# Altium PCB FPGA.PcbDoc
Units mil, origin at the board's own origin, x right, y up, seen from the top; angles counter-clockwise.
Board outline 1968.5 x 984.25 mil, 4 copper layers (Top Layer, Mid-Layer 1, Mid-Layer 2, Bottom Layer); 72 components, 68 nets, 486 pads, 137 vias.
Unrouted connection lines stored in the file: 6.
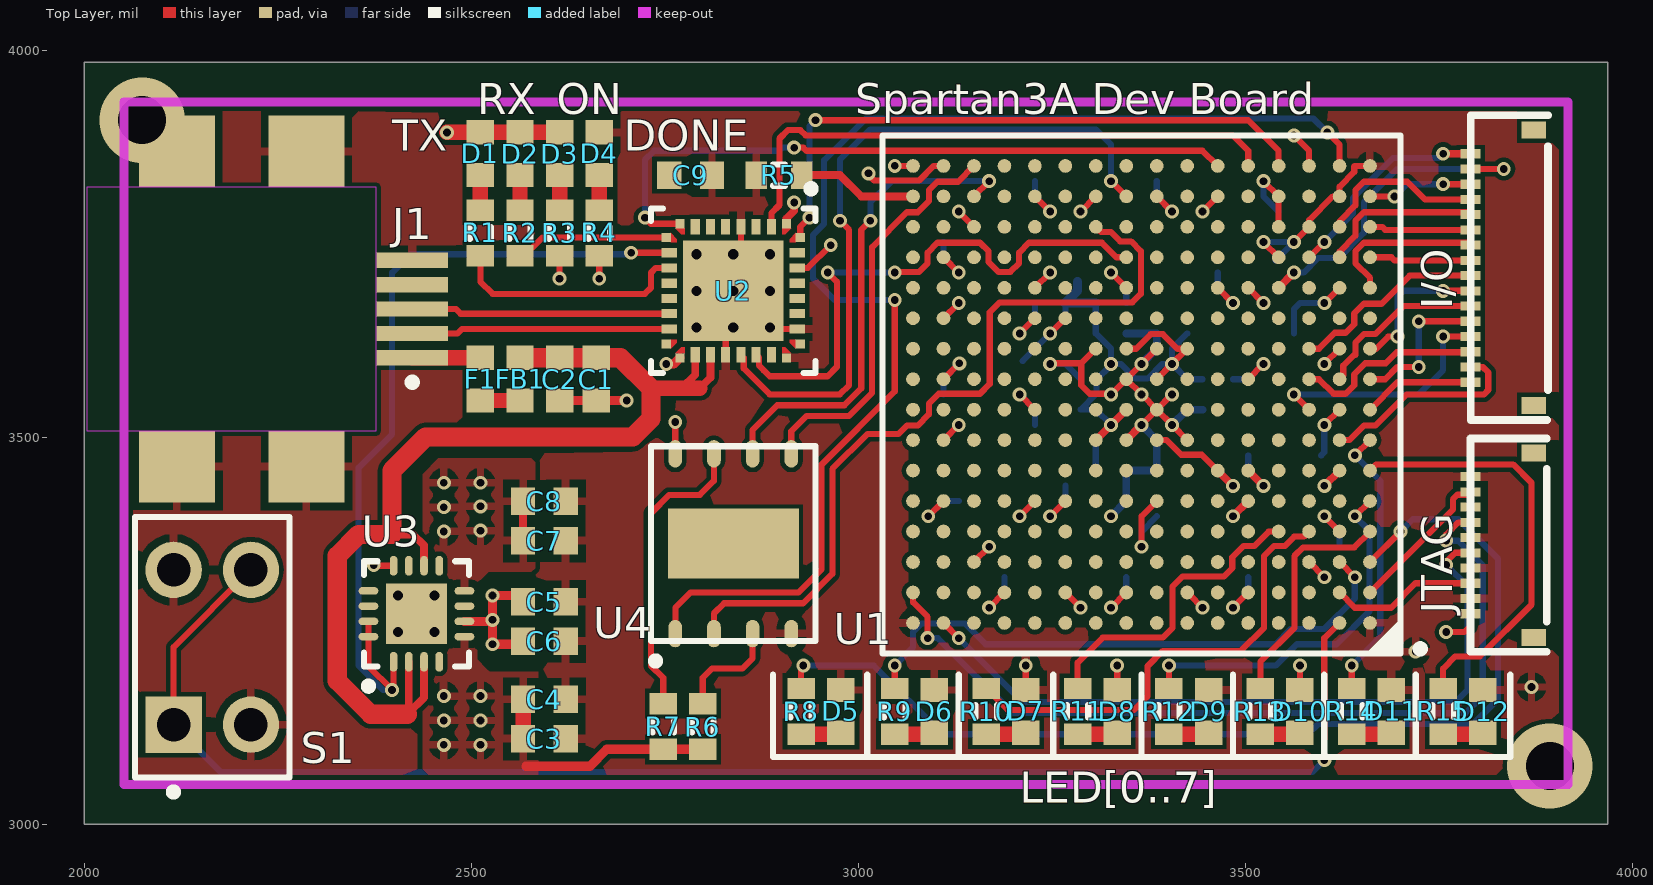
[diagram p0: Top Layer view]
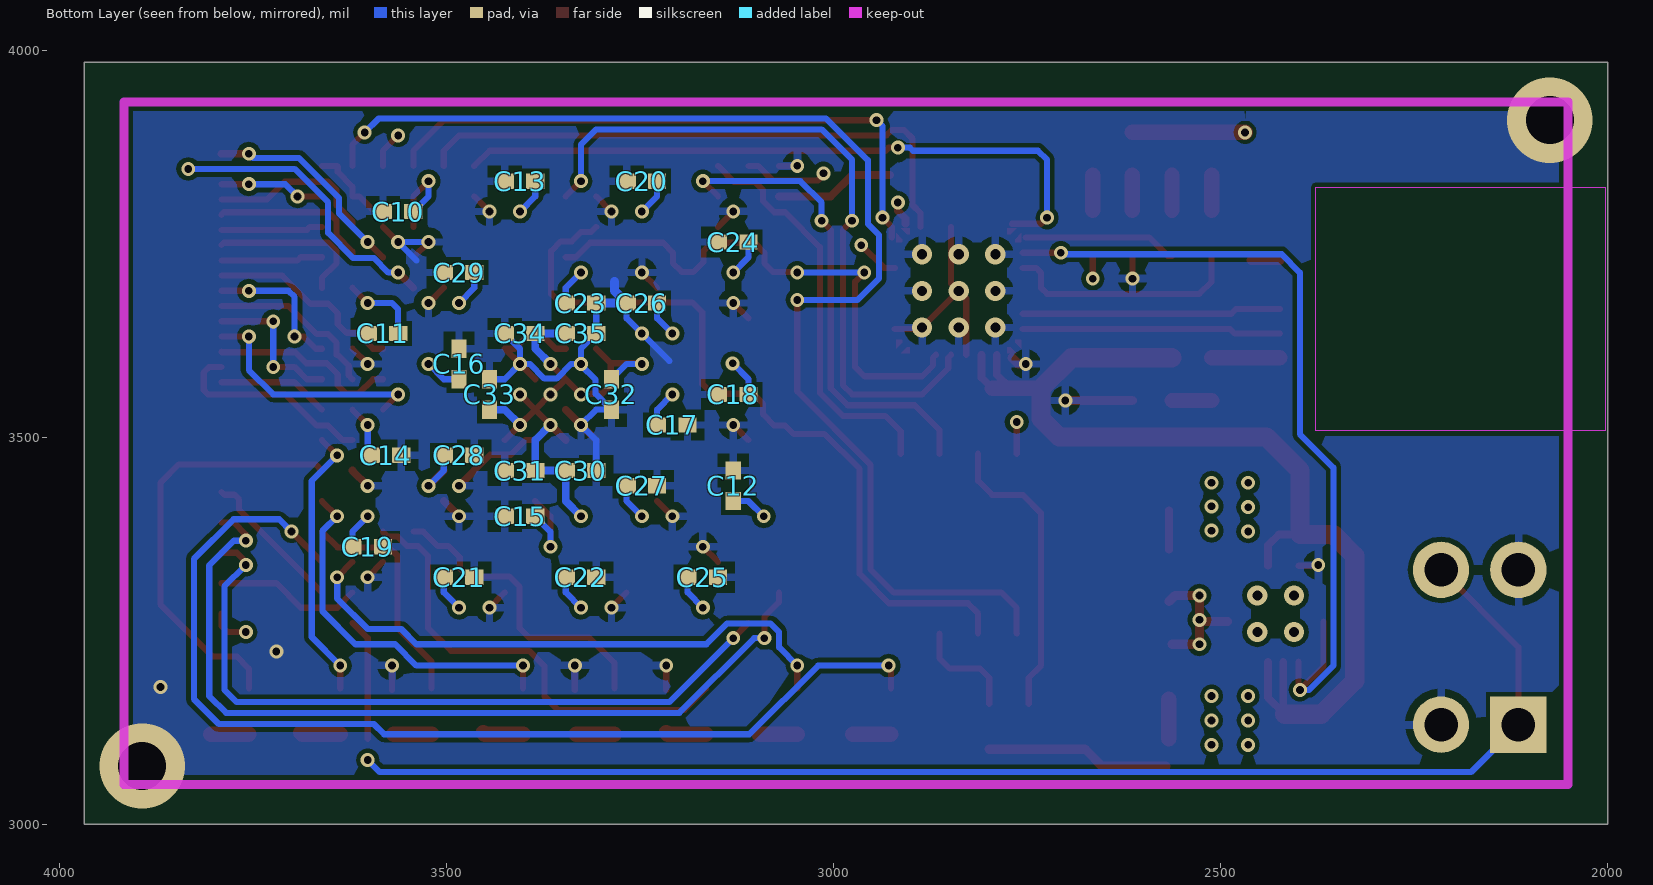
[diagram p1: Bottom Layer view, seen from below]
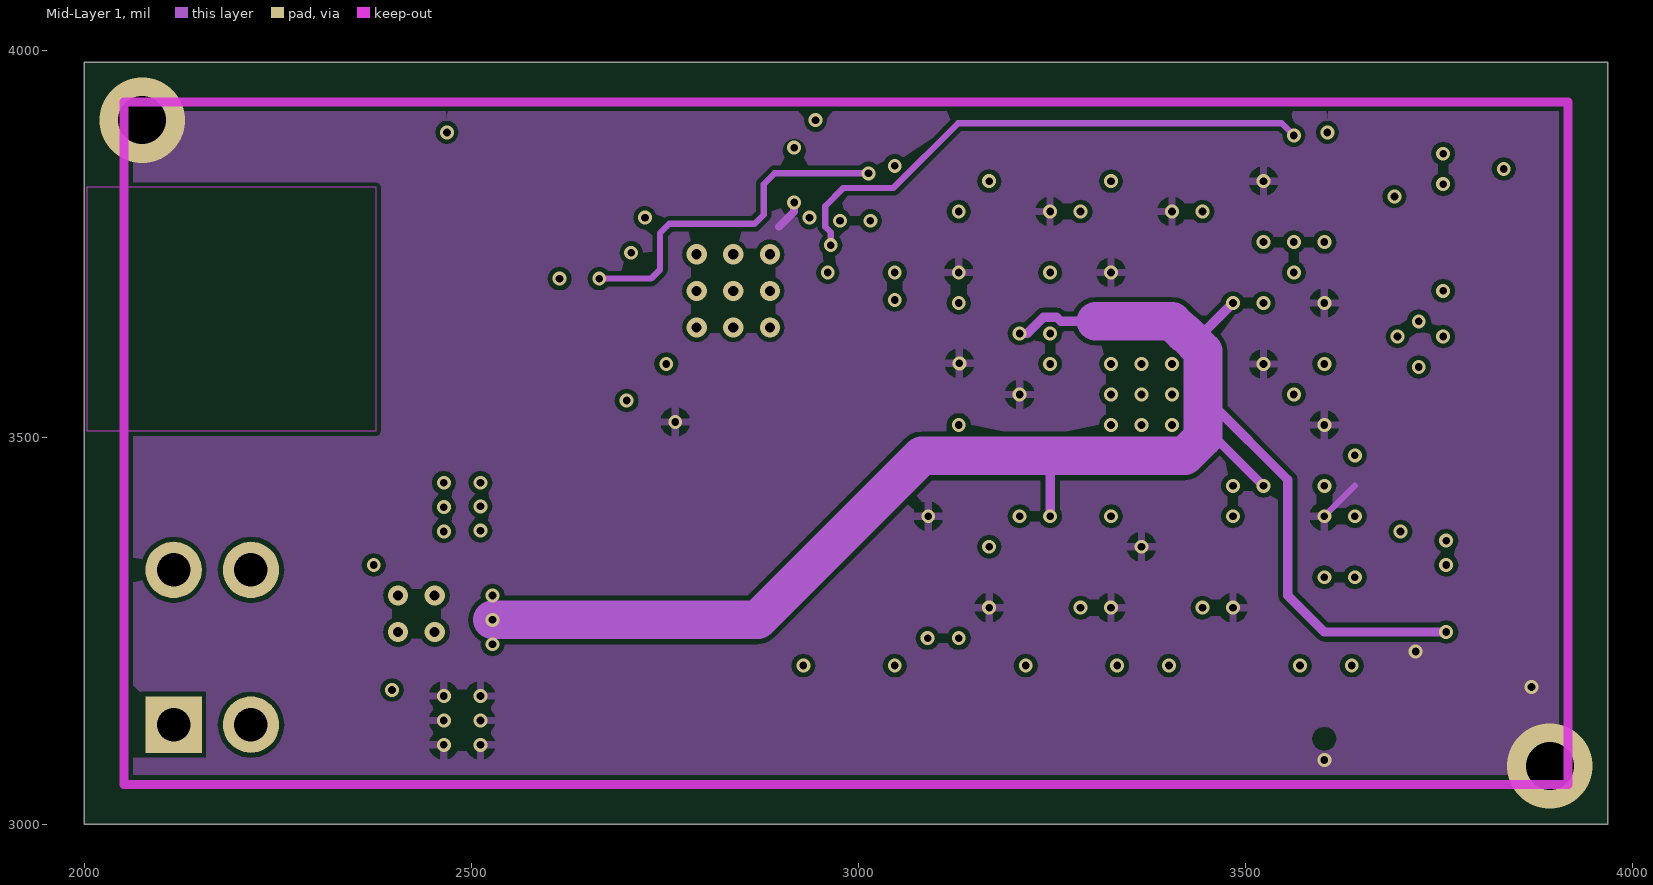
[diagram p2: Mid-Layer 1]
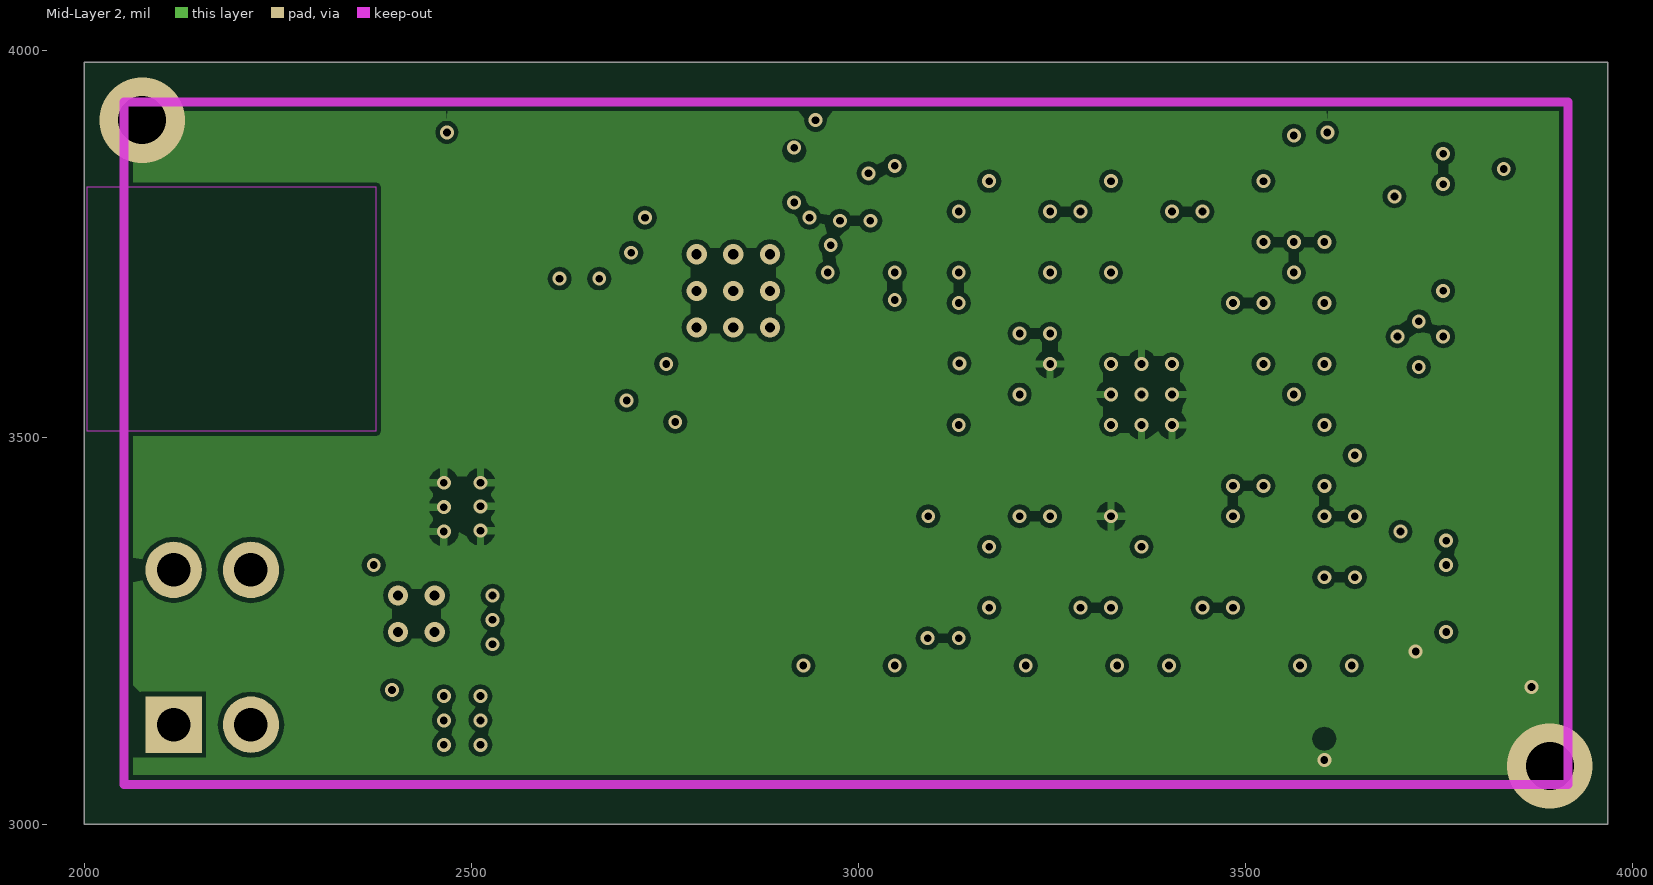
[diagram p3: Mid-Layer 2]

## Layer stack, top to bottom
Top Layer: signal copper 1.4
Dielectric: core 12.6, FR-4, Dk 4.8
Mid-Layer 1: signal copper 1.4
Dielectric: prepreg 12.6, FR-4, Dk 4.8
Mid-Layer 2: signal copper 1.4
Dielectric: core 12.6, FR-4, Dk 4.8
Bottom Layer: signal copper 1.4

## Board outline
2000,3000 3968.5,3000 3968.5,3984.25 2000,3984.25

## Design rules (kind name [scope] priority, off if disabled: settings)
Clearance [All] p1: gap=6
PolygonConnect [All] p1: connectstyle=Relief reliefconductorwidth=10 reliefentries=4 polygonreliefangle="90 Angle" airgapwidth=10
RoomDefinition USB [InComponentClass('USB')] p1: confinementstyle=ConfineIn formatcopy=TRUE lockcomponents=FALSE outline 4015.74,3283.46 8259.83,3283.46 8259.83,5649.6 4015.74,5649.6
RoomDefinition Power [InComponentClass('Power')] p2: confinementstyle=ConfineIn formatcopy=TRUE lockcomponents=FALSE outline 4015.74,3972.43 9039.35,3972.43 9039.35,4976.37 4015.74,4976.37
RoomDefinition IO [InComponentClass('IO')] p3: confinementstyle=ConfineIn formatcopy=TRUE lockcomponents=FALSE outline 4011.8,3055.11 8940.93,3055.11 8940.93,5649.6 4011.8,5649.6
RoutingVias [All] p1: holewidth=10 width=18 viastyle="Through Hole" minholewidth=10 minwidth=18 maxholewidth=10 maxwidth=18
SolderMaskExpansion [All] p1: expansion=4
Width [All] p1: maxlimit=100 minlimit=6 preferedwidth=8
28 further rules are at their usual default settings.

## Classes and differential pairs
component class IO: D5 D6 D7 D8 D9 D10 D11 D12 I/O R6 R7 R8 R9 R10 R11 R12 R13 R14 R15 U1 U4
component class Power: C10 C11 C12 C13 C14 C15 C16 C17 C18 C19 C20 C21 C22 C23 C24 C25 C34 C35 D4 JTAG R4 R5 S1
component class USB: C1 C2 C3 C4 C5 C6 C7 C8 C9 D1 D2 D3 F1 FB1 J1 R1 R2 R3 U2 U3
net class LED[0..7]: LED0 LED1 LED2 LED3 LED4 LED5 LED6 LED7

## Components (designator, comment, footprint, x,y, rotation, side; value= is the part's Value field where it differs from the comment)
C1 "Cap Semi" 1608[0603] 2661.42,3574.8 r90 top
C2 "Cap Semi" 1608[0603] 2614.17,3574.8 r90 top
C3 "Cap Semi" 1608[0603] 2594.49,3110.24 r180 top
C4 "Cap Semi" 1608[0603] 2594.49,3161.42 r180 top
C5 "Cap Semi" 1608[0603] 2594.49,3287.4 r180 top
C6 "Cap Semi" 1608[0603] 2594.49,3236.22 r180 top
C7 "Cap Semi" 1608[0603] 2594.49,3366.14 r180 top
C8 "Cap Semi" 1608[0603] 2594.49,3417.32 r180 top
C9 "Cap Semi" 1608[0603] 2783.46,3838.58 r180 top
C10 "Cap Semi" 0402 3562.99,3791.34 r0 bottom
C11 "Cap Semi" 0402 3582.68,3633.86 r0 bottom
C12 "Cap Semi" 0402 3129.92,3437.01 r90 bottom
C13 "Cap Semi" 0402 3405.51,3830.71 r0 bottom
C14 "Cap Semi" 0402 3578.74,3476.38 r180 bottom
C15 "Cap Semi" 0402 3405.51,3397.64 r0 bottom
C16 "Cap Semi" 0402 3484.25,3594.49 r90 bottom
C17 "Cap Semi" 0402 3208.66,3515.75 r180 bottom
C18 "Cap Semi" 0402 3129.92,3555.12 r0 bottom
C19 "Cap Semi" 0402 3602.36,3358.27 r180 bottom
C20 "Cap Semi" 0402 3248.03,3830.71 r0 bottom
C21 "Cap Semi" 0402 3484.25,3318.9 r180 bottom
C22 "Cap Semi" 0402 3326.77,3318.9 r180 bottom
C23 "Cap Semi" 0402 3326.77,3673.23 r180 bottom
C24 "Cap Semi" 0402 3129.92,3751.97 r0 bottom
C25 "Cap Semi" 0402 3169.29,3318.9 r180 bottom
C26 "Cap Semi" 0402 3248.03,3673.23 r0 bottom
C27 "Cap Semi" 0402 3248.03,3437.01 r180 bottom
C28 "Cap Semi" 0402 3484.25,3476.38 r180 bottom
C29 "Cap Semi" 0402 3484.25,3712.6 r0 bottom
C30 "Cap Semi" 0402 3326.77,3456.69 r180 bottom
C31 "Cap Semi" 0402 3405.51,3456.69 r0 bottom
C32 "Cap Semi" 0402 3287.4,3555.12 r270 bottom
C33 "Cap Semi" 0402 3444.88,3555.12 r90 bottom
C34 "Cap Semi" 0402 3405.51,3633.86 r0 bottom
C35 "Cap Semi" 0402 3326.77,3633.86 r180 bottom
D1 "LED3" 1608[0603] 2511.81,3866.14 r270 top
D2 "LED3" 1608[0603] 2562.99,3866.14 r270 top
D3 "LED3" 1608[0603] 2614.17,3866.14 r270 top
D4 "LED3" 1608[0603] 2665.35,3866.14 r90 top
D5 "LED3" 1608[0603] 2977.44,3145.67 r90 top
D6 "LED3" 1608[0603] 3098.43,3145.67 r90 top
D7 "LED3" 1608[0603] 3216.54,3145.67 r90 top
D8 "LED3" 1608[0603] 3334.65,3145.67 r90 top
D9 "LED3" 1608[0603] 3452.76,3145.67 r90 top
D10 "LED3" 1608[0603] 3570.87,3145.67 r90 top
D11 "LED3" 1608[0603] 3688.98,3145.67 r90 top
D12 "LED3" 1608[0603] 3807.09,3145.67 r90 top
F1 "500mA" 1608[0603] 2511.81,3574.8 r270 top
FB1 "Ferrite Bead" 1608[0603] 2562.99,3574.8 r90 top
I/O "IO" PCBComponent_1 3791.34,3570.87 r90 top
J1 "0481900001" 481900001 2271.65,3665.35 r180 top (schematic designator J?)
JTAG "FH33-10S" "PCBComponent_1 - duplicate" 3791.34,3271.65 r90 top
R1 "Res3" J1-0603 2511.81,3763.78 r90 top
R2 "Res3" J1-0603 2562.99,3763.78 r90 top
R3 "Res3" J1-0603 2614.17,3763.78 r90 top
R4 "Res3" J1-0603 2665.35,3763.78 r270 top
R5 "Res3" J1-0603 2897.64,3838.58 r0 top
R6 "Res3" J1-0603 2799.21,3125.98 r90 top
R7 "Res3" J1-0603 2748.03,3125.98 r270 top
R8 "Res3" J1-0603 2926.26,3145.67 r270 top
R9 "Res3" J1-0603 3047.24,3145.67 r270 top
R10 "Res3" J1-0603 3165.35,3145.67 r270 top
R11 "Res3" J1-0603 3283.46,3145.67 r270 top
R12 "Res3" J1-0603 3401.57,3145.67 r270 top
R13 "Res3" J1-0603 3519.68,3145.67 r270 top
R14 "Res3" J1-0603 3637.8,3145.67 r270 top
R15 "Res3" J1-0603 3755.91,3145.67 r270 top
S1 "SW-DPST" DPST-4 2165.35,3228.35 r90 top
U1 "XC3S50A-4FT256C" FT256 3366.14,3555.12 r180 top
U2 "FT232RQ-Reel" PQFN5X5-32_V 2838.58,3688.98 r270 top
U3 "ADP322" QFN16_N 2429.13,3271.65 r90 top
U4 "W25Q80" QFN127P500X600X80_HS-9N 2838.58,3362.2 r90 top

## Footprints (in the part's own frame and the unit in brackets; to place one, negate y for a bottom-side part, rotate by r counter-clockwise, add the part's x,y. Pads: shape width x height; smd on the part's side, far side on the other; paste and mask are expansions set on the pad)
0402 [mm] "Chip Capacitor, Body 1.0x0.5mm, IPC High Density"
  rect 0.6x0.5 smd: 1(-0.5,0) 2(0.5,0)
  body extent -0.55,-0.3 0.55,0.3, height 1.3
1608[0603] [mm] "Chip Capacitor, Body 1.6x0.8mm, IPC High Density"
  rect 0.8x0.9 smd: 1(-0.7,0) 2(0.7,0)
  body extent -0.87,-0.48 0.87,0.48, height 1.3
481900001 [mm] "Connector; USB Mini-B, Sinking Type, SM; 5 Position; Right Angle"
  rect 2.35x0.5 smd: 1(-3.862,1.6) 2(-3.862,0.8) 3(-3.862,0) 4(-3.862,-0.8) 5(-3.862,-1.6)
  rect 2.5x2.35 smd: MH1(-0.387,-5.175) MH2(3.863,-5.175) MH3(3.863,5.175) MH4(-0.387,5.175)
  Keep-Out Layer region: -2.687,-4 6.813,-4 6.813,4 -2.687,4
  silkscreen extent -3.99,2.28 -3.74,2.52, body extent -1.8,-3.84 6.8,3.86, height 0.35
DPST-4 [mm] "Switch; 4 Leads"
  rect 1.85x1.85 hole 1.1: 1(-2.54,1.27)
  round 1.85 hole 1.1: 2(-2.54,-1.27) 3(2.54,-1.27) 4(2.54,1.27)
  silkscreen extent -4.88,-2.54 4.28,2.54
FT256 [mm] "BGA, 256-Leads, Body 17x17mm, Pitch 1mm"
  round 0.45 smd: A1(-7.5,7.5) A2(-6.5,7.5) A3(-5.5,7.5) A4(-4.5,7.5) A5(-3.5,7.5) A6(-2.5,7.5) A7(-1.5,7.5) A8(-0.5,7.5) A9(0.5,7.5) A10(1.5,7.5) A11(2.5,7.5) A12(3.5,7.5) A13(4.5,7.5) A14(5.5,7.5) A15(6.5,7.5) A16(7.5,7.5) B1(-7.5,6.5) B2(-6.5,6.5) B3(-5.5,6.5) B4(-4.5,6.5) B5(-3.5,6.5) B6(-2.5,6.5) B7(-1.5,6.5) B8(-0.5,6.5) B9(0.5,6.5) B10(1.5,6.5) B11(2.5,6.5) B12(3.5,6.5) B13(4.5,6.5) B14(5.5,6.5) B15(6.5,6.5) B16(7.5,6.5) C1(-7.5,5.5) C2(-6.5,5.5) C3(-5.5,5.5) C4(-4.5,5.5) C5(-3.5,5.5) C6(-2.5,5.5) C7(-1.5,5.5) C8(-0.5,5.5) C9(0.5,5.5) C10(1.5,5.5) C11(2.5,5.5) C12(3.5,5.5) C13(4.5,5.5) C14(5.5,5.5) C15(6.5,5.5) C16(7.5,5.5) D1(-7.5,4.5) D2(-6.5,4.5) D3(-5.5,4.5) D4(-4.5,4.5) D5(-3.5,4.5) D6(-2.5,4.5) D7(-1.5,4.5) D8(-0.5,4.5) D9(0.5,4.5) D10(1.5,4.5) D11(2.5,4.5) D12(3.5,4.5) D13(4.5,4.5) D14(5.5,4.5) D15(6.5,4.5) D16(7.5,4.5) E1(-7.5,3.5) E2(-6.5,3.5) E3(-5.5,3.5) E4(-4.5,3.5) E5(-3.5,3.5) E6(-2.5,3.5) E7(-1.5,3.5) E8(-0.5,3.5) E9(0.5,3.5) E10(1.5,3.5) E11(2.5,3.5) E12(3.5,3.5) E13(4.5,3.5) E14(5.5,3.5) E15(6.5,3.5) E16(7.5,3.5) F1(-7.5,2.5) F2(-6.5,2.5) F3(-5.5,2.5) F4(-4.5,2.5) F5(-3.5,2.5) F6(-2.5,2.5) F7(-1.5,2.5) F8(-0.5,2.5) F9(0.5,2.5) F10(1.5,2.5) F11(2.5,2.5) F12(3.5,2.5) F13(4.5,2.5) F14(5.5,2.5) F15(6.5,2.5) F16(7.5,2.5) G1(-7.5,1.5) G2(-6.5,1.5) G3(-5.5,1.5) G4(-4.5,1.5) G5(-3.5,1.5) G6(-2.5,1.5) G7(-1.5,1.5) G8(-0.5,1.5) G9(0.5,1.5) G10(1.5,1.5) G11(2.5,1.5) G12(3.5,1.5) G13(4.5,1.5) G14(5.5,1.5) G15(6.5,1.5) G16(7.5,1.5) H1(-7.5,0.5) H2(-6.5,0.5) H3(-5.5,0.5) H4(-4.5,0.5) H5(-3.5,0.5) H6(-2.5,0.5) H7(-1.5,0.5) H8(-0.5,0.5) H9(0.5,0.5) H10(1.5,0.5) H11(2.5,0.5) H12(3.5,0.5) H13(4.5,0.5) H14(5.5,0.5) H15(6.5,0.5) H16(7.5,0.5) J1(-7.5,-0.5) J2(-6.5,-0.5) J3(-5.5,-0.5) J4(-4.5,-0.5) J5(-3.5,-0.5) J6(-2.5,-0.5) J7(-1.5,-0.5) J8(-0.5,-0.5) J9(0.5,-0.5) J10(1.5,-0.5) J11(2.5,-0.5) J12(3.5,-0.5) J13(4.5,-0.5) J14(5.5,-0.5) J15(6.5,-0.5) J16(7.5,-0.5) K1(-7.5,-1.5) K2(-6.5,-1.5) K3(-5.5,-1.5) K4(-4.5,-1.5) K5(-3.5,-1.5) K6(-2.5,-1.5) K7(-1.5,-1.5) K8(-0.5,-1.5) K9(0.5,-1.5) K10(1.5,-1.5) K11(2.5,-1.5) K12(3.5,-1.5) K13(4.5,-1.5) K14(5.5,-1.5) K15(6.5,-1.5) K16(7.5,-1.5) L1(-7.5,-2.5) L2(-6.5,-2.5) L3(-5.5,-2.5) L4(-4.5,-2.5) L5(-3.5,-2.5) L6(-2.5,-2.5) L7(-1.5,-2.5) L8(-0.5,-2.5) L9(0.5,-2.5) L10(1.5,-2.5) L11(2.5,-2.5) L12(3.5,-2.5) L13(4.5,-2.5) L14(5.5,-2.5) L15(6.5,-2.5) L16(7.5,-2.5) M1(-7.5,-3.5) M2(-6.5,-3.5) M3(-5.5,-3.5) M4(-4.5,-3.5) M5(-3.5,-3.5) M6(-2.5,-3.5) M7(-1.5,-3.5) M8(-0.5,-3.5) M9(0.5,-3.5) M10(1.5,-3.5) M11(2.5,-3.5) M12(3.5,-3.5) M13(4.5,-3.5) M14(5.5,-3.5) M15(6.5,-3.5) M16(7.5,-3.5) N1(-7.5,-4.5) N2(-6.5,-4.5) N3(-5.5,-4.5) N4(-4.5,-4.5) N5(-3.5,-4.5) N6(-2.5,-4.5) N7(-1.5,-4.5) N8(-0.5,-4.5) N9(0.5,-4.5) N10(1.5,-4.5) N11(2.5,-4.5) N12(3.5,-4.5) N13(4.5,-4.5) N14(5.5,-4.5) N15(6.5,-4.5) N16(7.5,-4.5) P1(-7.5,-5.5) P2(-6.5,-5.5) P3(-5.5,-5.5) P4(-4.5,-5.5) P5(-3.5,-5.5) P6(-2.5,-5.5) P7(-1.5,-5.5) P8(-0.5,-5.5) P9(0.5,-5.5) P10(1.5,-5.5) P11(2.5,-5.5) P12(3.5,-5.5) P13(4.5,-5.5) P14(5.5,-5.5) P15(6.5,-5.5) P16(7.5,-5.5) R1(-7.5,-6.5) R2(-6.5,-6.5) R3(-5.5,-6.5) R4(-4.5,-6.5) R5(-3.5,-6.5) R6(-2.5,-6.5) R7(-1.5,-6.5) R8(-0.5,-6.5) R9(0.5,-6.5) R10(1.5,-6.5) R11(2.5,-6.5) R12(3.5,-6.5) R13(4.5,-6.5) R14(5.5,-6.5) R15(6.5,-6.5) R16(7.5,-6.5) T1(-7.5,-7.5) T2(-6.5,-7.5) T3(-5.5,-7.5) T4(-4.5,-7.5) T5(-3.5,-7.5) T6(-2.5,-7.5) T7(-1.5,-7.5) T8(-0.5,-7.5) T9(0.5,-7.5) T10(1.5,-7.5) T11(2.5,-7.5) T12(3.5,-7.5) T13(4.5,-7.5) T14(5.5,-7.5) T15(6.5,-7.5) T16(7.5,-7.5)
  silkscreen extent -9.28,-8.5 8.5,8.5, body extent -8.5,-8.5 8.5,8.5, height 1.55
J1-0603 [mm] "Chip Resistor, Body 1.6x0.8mm, IPC High Density"
  rect 0.7x0.9 smd: 1(-0.75,0) 2(0.75,0)
  silkscreen extent -0.2,-0.35 0.2,0.35, body extent -0.85,-0.48 0.85,0.48, height 0.9
PCBComponent_1 [mm]
  rect 0.55x0.8 smd mask+0.05: 0(-0.763,-2.075) 0(8.275,-2.075)
  rect 0.3x0.65 smd mask+0.05: 1(0,0) 2(0.5,0) 3(1,0) 4(1.5,0) 5(2,0) 6(2.5,0) 7(3,0) 8(3.5,0) 9(4,0) 10(4.5,0) 11(5,0) 12(5.5,0) 13(6,0) 14(6.5,0) 15(7,0) 16(7.5,0)
  silkscreen extent -1.24,-2.54 8.76,-0.01
"PCBComponent_1 - duplicate" [mm]
  rect 0.55x0.8 smd mask+0.05: 0(-0.775,-2.075) 0(5.275,-2.075)
  rect 0.3x0.65 smd mask+0.05: 1(0,0) 2(0.5,0) 3(1,0) 4(1.5,0) 5(2,0) 6(2.5,0) 7(3,0) 8(3.5,0) 9(4,0) 10(4.5,0)
  silkscreen extent -1.25,-2.5 5.75,0
PQFN5X5-32_V [mm] "QFN, 32-Leads, Body 5x5mm, Pitch 0.5mm, FTDI Recommended"
  rect 0.3x0.3 smd paste-0.15: 1(-2.2,1.75) 8(-2.2,-1.75) 9(-1.75,-2.2) 16(1.75,-2.2) 17(2.2,-1.75) 24(2.2,1.75) 25(1.75,2.2) 32(-1.75,2.2)
  rect 0.5x0.3 smd paste-0.15: 2(-2.1,1.25) 3(-2.1,0.75) 4(-2.1,0.25) 5(-2.1,-0.25) 6(-2.1,-0.75) 7(-2.1,-1.25) 18(2.1,-1.25) 19(2.1,-0.75) 20(2.1,-0.25) 21(2.1,0.25) 22(2.1,0.75) 23(2.1,1.25)
  rect 0.3x0.5 smd paste-0.15: 10(-1.25,-2.1) 11(-0.75,-2.1) 12(-0.25,-2.1) 13(0.25,-2.1) 14(0.75,-2.1) 15(1.25,-2.1) 26(1.25,2.1) 27(0.75,2.1) 28(0.25,2.1) 29(-0.25,2.1) 30(-0.75,2.1) 31(-1.25,2.1)
  rect 3.3x3.3 smd paste-1.65: 33(0,0)
  Top Layer region: -1.6,2.05 -1.6,1.85 -1.7,1.85 -1.9,2.05
  Top Layer region: 1.6,2.05 1.6,1.85 1.7,1.85 1.9,2.05
  Top Layer region: 1.6,-2.05 1.6,-1.85 1.7,-1.85 1.9,-2.05
  Top Layer region: -1.6,-2.05 -1.6,-1.85 -1.7,-1.85 -1.9,-2.05
  Top Layer region: -2.05,1.6 -1.85,1.6 -1.85,1.7 -2.05,1.9
  Top Layer region: 2.05,1.6 1.85,1.6 1.85,1.7 2.05,1.9
  Top Layer region: 2.05,-1.6 1.85,-1.6 1.85,-1.7 2.05,-1.9
  Top Layer region: -2.05,-1.6 -1.85,-1.6 -1.85,-1.7 -2.05,-1.9
  silkscreen extent -3.47,-2.7 2.7,2.7, body extent -2.55,-2.55 2.55,2.55, height 1
QFN16_N [mm] "QFN, 16-Leads, Body 3x3mm, Pitch 0.5mm, IPC Medium Density"
  oval 0.65x0.25 smd: 1(-1.575,0.75) 2(-1.575,0.25) 3(-1.575,-0.25) 4(-1.575,-0.75) 9(1.575,-0.75) 10(1.575,-0.25) 11(1.575,0.25) 12(1.575,0.75)
  oval 0.25x0.65 smd: 5(-0.75,-1.575) 6(-0.25,-1.575) 7(0.25,-1.575) 8(0.75,-1.575) 13(0.75,1.575) 14(0.25,1.575) 15(-0.25,1.575) 16(-0.75,1.575)
  rect 2x2 smd: 17(0,0)
  silkscreen extent -2.5,-1.73 1.73,1.73, body extent -1.58,-1.58 1.58,1.58, height 0.9
QFN127P500X600X80_HS-9N [mm] "QFN, 8-Leads, Body 5.00x6.00mm, Pitch 1.27mm, Thermal Pad 2.30x4.30mm, IPC Medium Density"
  oval 0.9x0.45 smd: 1(-2.95,1.905) 2(-2.95,0.635) 3(-2.95,-0.635) 4(-2.95,-1.905) 5(2.95,-1.905) 6(2.95,-0.635) 7(2.95,0.635) 8(2.95,1.905)
  rect 2.3x4.3 smd: 9(0,0)
  silkscreen extent -3.97,-2.7 3.2,2.7, body extent -3.05,-2.56 3.05,2.54, height 0.8

## Part data
C1 C2 C3 C4 C5 C6 C7 C8 C9 C10 C11 C12 C13 C14 C15 C16 C17 C18 C19 C20 C21 C22 C23 C24 C25 C26 C27 C28 C29 C30 C31 C32 C33 C34 C35: "Capacitor (Semiconductor SIM Model)"
D1 D2 D3 D4 D5 D6 D7 D8 D9 D10 D11 D12: "Typical BLUE SiC LED"
F1: library part "Fuse 2", "Fuse"
FB1: library part Inductor, "Inductor"
I/O JTAG U3 U4: library part Component_1
J1: "USB On-The-Go (OTG) Mini-B Receptacle, Right Angle, SMT, 0.80mm (.031\") Pitch, Solder Tabs with Back Cover, Recessed Type"
R1 R2 R3 R4 R5 R6 R7 R8 R9 R10 R11 R12 R13 R14 R15: "Resistor"
S1: "Double-Pole, Single-Throw Switch"
U1: "Spartan-3A I/O Optimized FPGA, 144 User I/Os, 256-Ball FTBGA, Standard Performance, Commercial Grade"
U2: "USB UART Asynchronous Serial Data Transfer Chip, QFN-32, Tape and Reel"

## Via types
v1: diameter 18, hole 10, Top Layer to Bottom Layer, tented both sides, 107 vias
v2: diameter 18, hole 10, Top Layer to Bottom Layer, 15 vias
v3: diameter 25.98, hole 12.99, Top Layer to Bottom Layer, tented top, 13 vias
v4: diameter 110, hole 62, Top Layer to Bottom Layer, 2 vias

## Nets (pads, with @x,y where several pads share a name; then routed paths per layer and width w, separated by ;. In a path a pad name is that pad's centre, name@x,y a point inside that pad or via, vN(x,y) a via of type N, cw(c..) or ccw(c..) an arc to the next point about the centre after c; other vN are vias at no path point)
1V2: C7.2 C8.2 C30.1 C31.1 C32.1 C33.1 C34.1 C35.1 U1.G7 U1.G9 U1.H8 U1.J9 U1.K8 U1.K10 U3.8 | length 820.4
  Top Layer w8: v1(3248.03,3594.49) 3248.86,3595.31 3288.23,3595.31 ; U1.K10 3288.23,3595.31 ; v1(3366.14,3515.75) U1.H8 ; U1.K8 v1(3366.14,3594.49) U1.J9 ; v1(3405.51,3555.12) U1.H8 ; U1.G7 v1(3405.51,3515.75) U1.H8 ; 3288.23,3595.31 3288.23,3566.99 3299.28,3555.94 3325.95,3555.94 v1(3326.77,3555.12) U1.J9 ; U1.J9 v1(3366.14,3555.12) U1.H8
  Top Layer w10: C7.2@2566.93,3354.33 C8.2@2566.93,3405.51 ; U1.G9 v1(3366.14,3515.75)
  Bottom Layer w8: v1(3248.03,3594.49) 3267.72,3594.49 C32.1
  Bottom Layer w10: v1(3326.77,3397.64) 3346.46,3417.32 C30.1 C31.1@3381.89,3456.69 ; C35.1 C34.1 3385.83,3614.17 v1(3366.14,3594.49) ; v1(3366.14,3515.75) 3385.83,3496.06 C31.1 ; v1(3405.51,3515.75) 3425.2,3535.43 C33.1
  other v2: 2464.57,3377.95 2511.81,3379.02 2464.57,3409.45 2511.81,3410.51 2464.57,3440.94 2511.81,3440.94
2V5: C5.2 C6.2 C26.1 C27.1 C28.1 C29.1 JTAG.1 U1.E11 U1.F5 U1.L12 U1.M6 U3.6 | length 2706.2
  Top Layer w8: v1(3208.66,3633.86) U1.L12 ; v1(3248.03,3397.64) U1.E11 ; U1.M6 v1(3484.24,3673.22) ; v1(3759.84,3248.03) 3783.46,3248.03 3791.34,3255.91 JTAG.1
  Top Layer w10: U1.F5 v1(3523.61,3437)
  Top Layer w12: U3.6 v2@2525.59,3261.81 ; C6.2@2562.99,3232.28 v2(2527.56,3232.28) 2527.56,3259.84 v2@2525.59,3261.81 ; C5.2 2559.05,3295.28 v2(2527.56,3295.28) v2(2527.56,3263.78) v2@2525.59,3261.81
  Mid-Layer 1 w8: 3422.08,3634.49 3445.51,3634.49
  Mid-Layer 1 w12: v1(3208.66,3633.86) 3218.33,3633.86 3239.33,3654.86 3256.73,3654.86 3261.98,3649.61 3307.09,3649.61 ; v1(3248.03,3397.64) 3248.03,3471.81 3251.97,3475.75 ; 3445.51,3499.18 3461.44,3499.18 v1(3523.61,3437) ; 3445.51,3543.31 3456.69,3543.31 3555.12,3444.88 3555.12,3295.28 3602.36,3248.03 v1(3759.84,3248.03) ; 3445.51,3634.49 v1(3484.24,3673.22)
  Mid-Layer 1 w50: v2(2527.56,3263.78) 2870.08,3263.78 3082.05,3475.75 3251.97,3475.75 3422.08,3475.75 3445.51,3499.18 3445.51,3543.31 3445.51,3611.06 3422.08,3634.49 3420.63,3634.49 3405.51,3649.61 3307.09,3649.61
  Bottom Layer w8: v1(3208.66,3633.86) 3228.35,3653.54 C26.1 ; v1(3248.03,3397.64) 3267.72,3417.32 C27.1 ; C29.1 3464.57,3692.9 v1(3484.24,3673.22) ; C28.1 3503.94,3456.68 v1(3523.61,3437)
3V3: C3.2 C4.2 C9.2 C10.1 C11.1 C12.1 C13.1 C14.1 C15.1 C16.1 C17.1 C18.1 C19.1 C20.1 C21.1 C22.1 C23.1 C24.1 C25.1 R6.1 R7.2 U1.B5 U1.B9 U1.B13 U1.D2 U1.E8 U1.E15 U1.H2 U1.H12 U1.J5 U1.J15 U1.M2 U1.M9 U1.N15 U1.P4 U1.R4 U1.R8 U1.R12 U2.1 U3.5 U4.8 | length 1763.6
  Top Layer w8: U4.8 v1(2763.58,3519.49) ; v1(3090.55,3397.64) U1.E15 ; U1.J15 v1(3130.75,3595.31) ; U1.N15 v1(3129.92,3712.6) ; v1(3169.29,3279.53) U1.B13 ; v1(3208.66,3555.12) U1.H12 ; U1.R12 v1(3248.03,3791.34) ; v1(3326.77,3279.53) U1.B9 ; v1(3326.77,3712.6) U1.M9 ; v1(3366.14,3358.27) 3366.14,3397.64 U1.E8 ; U1.R8 v1(3405.51,3791.34) ; v1(3484.25,3279.53) U1.B5 ; U1.J5 v1(3523.62,3594.49) ; v1(3523.62,3830.71) U1.R4 U1.P4 ; v1(3602.36,3397.64) U1.D2 ; v1(3602.36,3515.75) U1.H2 ; v1(3602.36,3673.23) U1.M2
  Top Layer w10: U2.1 2907.48,3782.54 2917.32,3792.38 v1(2917.32,3803.15)
  Top Layer w12: 2570.87,3074.8 2653.54,3074.8 2675.2,3096.46 R6.1
  Top Layer w20: C3.2 C4.2
  Mid-Layer 1 w8: v1(3602.36,3397.64) 3641.73,3437.01
  Mid-Layer 1 w10: 2897.64,3771.65 2917.01,3791.02 2917.01,3802.83 v1(2917.32,3803.15)
  Bottom Layer w8: v1(3090.55,3397.64) 3110.24,3417.32 C12.1 ; C18.1 3110.24,3574.8 v1(3130.75,3595.31) ; C24.1 3110.24,3732.28 v1(3129.92,3712.6) ; v1(3169.29,3279.53) 3188.98,3299.21 C25.1 ; v1(3208.66,3555.12) 3228.35,3535.43 C17.1 ; C20.1 3228.35,3811.02 v1(3248.03,3791.34) ; v1(3326.77,3279.53) 3346.46,3299.21 C22.1 ; v1(3326.77,3712.6) 3346.46,3692.91 C23.1 ; v1(3366.14,3358.27) 3366.14,3377.95 C15.1 ; C13.1 3385.83,3811.02 v1(3405.51,3791.34) ; v1(3484.25,3279.53) 3503.94,3299.21 C21.1 ; C16.1 3503.94,3574.8 v1(3523.62,3594.49) ; v1(3523.62,3830.71) 3523.62,3811.02 C10.1 ; C11.1 3562.99,3665.35 3570.87,3673.23 v1(3602.36,3673.23) ; C14.1 3602.36,3480.32 v1(3602.36,3515.75) ; v1(3602.36,3397.64) 3622.05,3377.95 C19.1
  other v2: 2464.57,3102.36 2511.81,3102.36 2464.57,3133.86 2511.81,3133.86 2464.57,3165.35 2511.81,3165.35
3V3_FTDI: D1.1 D2.1 D3.1 | length 145.7
  Top Layer w20: v1(2468.5,3893.7) D1.1 D2.1 D3.1
CLK: U1.R14 U4.6 | length 631.4
  Top Layer w8: U4.6 2863.58,3509.25 2895.45,3541.12 2982.18,3541.12 3003.94,3562.88 3003.94,3767.72 v1(3015.75,3779.53) ; U1.R14 v1(3169.29,3830.71)
  Bottom Layer w8: v1(3015.75,3779.53) 3015.75,3803.15 3043.31,3830.71 v1(3169.29,3830.71)
CSO: U1.T2 U4.1 | length 1636.2
  Top Layer w8: U4.1 2763.78,3246.26 2763.78,3279.53 2783.46,3299.21 2922.97,3299.21 2952.76,3329 2952.76,3464.57 3047.24,3559.06 v1(3047.24,3677.17) ; v1(3606.3,3893.7) 3622.05,3877.95 U1.T2
  Bottom Layer w8: v1(3047.24,3677.17) 2969.19,3677.17 2941.63,3704.73 2941.63,3761.22 2956.01,3775.59 2956.01,3857.7 3009.95,3911.64 3588.36,3911.64 v1(3606.3,3893.7)
DONE_LED: R4.2 U1.T15 | length 594.6
  Top Layer w8: v1(2665.35,3704.72) R4.2 ; v1(3013.46,3840.87) 3013.46,3838.58 3020.51,3831.54 3078.68,3831.54 3097.54,3850.39 U1.T15
  Mid-Layer 1 w8: v1(2665.35,3704.72) 2732.28,3704.72 2744.09,3716.54 2744.09,3763.78 2755.91,3775.59 2866.14,3775.59 2877.95,3787.4 2877.95,3826.77 2892.05,3840.87 v1(3013.46,3840.87)
GND: C1.1 C2.1 C3.1 C4.1 C5.1 C6.1 C7.1 C8.1 C9.1 C10.2 C11.2 C12.2 C13.2 C14.2 C15.2 C16.2 C17.2 C18.2 C19.2 C20.2 C21.2 C22.2 C23.2 C24.2 C25.2 C26.2 C27.2 C28.2 C29.2 C30.2 C31.2 C32.2 C33.2 C34.2 C35.2 D4.2 D5.2 D6.2 D7.2 D8.2 D9.2 D10.2 D11.2 D12.2 J1.5 J1.MH1 J1.MH2 J1.MH3 J1.MH4 JTAG.2 JTAG.4 JTAG.6 JTAG.8 JTAG.10 R3.1 R5.1 S1.2 S1.4 U1.A1 U1.A16 U1.B7 U1.B11 U1.C3 U1.C14 U1.E5 U1.E12 U1.F2 U1.F6 U1.G8 U1.G10 U1.G15 U1.H9 U1.J8 U1.K2 U1.K7 U1.K9 U1.L11 U1.L15 U1.M5 U1.M12 U1.N4 U1.P3 U1.P14 U1.R2 U1.R6 U1.R10 U1.T1 U1.T16 U2.4 U2.17 U2.20 U2.24 U2.26 U2.33 U3.12 U3.17 U4.4 | length 2288.3
  Top Layer w8: v1(2374.01,3334.64) 2374.99,3333.66 U3.12 ; v1(2614.17,3704.72) R3.1 ; U2.20 2828.74,3679.13 v3(2838.58,3688.98) v3(2885.83,3641.73) 2887.8,3639.76 U2.26 ; U2.33@2848.43,3698.82 U2.4 ; v1(3047.24,3850.54) 3047.39,3850.39 U1.T16 ; U1.G15 v1(3129.92,3515.75) ; U1.L15 v1(3129.92,3673.23) ; v1(3129.92,3791.34) U1.P14 ; U1.C14 v1(3169.28,3358.26) ; v1(3208.66,3397.64) U1.E12 ; D7.2 v1(3216.54,3204.72) ; U1.M12 v1(3248.03,3712.6) ; v1(3248.03,3633.86) U1.L11 ; U1.B11 v1(3287.4,3279.53) ; v1(3287.4,3791.34) U1.R10 ; D8.2 v1(3334.65,3204.72) ; U1.K9 3359.16,3614.17 3378.02,3633.03 3393.64,3633.03 3412.5,3614.17 U1.K7 v1(3405.51,3594.49) U1.J8 ; U1.G8 3398.53,3496.06 3417.39,3477.2 3444.06,3477.2 U1.F6 ; U1.B7 3447.92,3276.49 v1(3444.88,3279.52) ; v1(3444.88,3791.34) U1.R6 ; U1.M5 v1(3523.61,3673.22) ; v1(3523.62,3751.97) U1.N4 ; v1(3562.99,3751.97) U1.P3 ; D10.2 v1(3570.87,3204.72) ; U1.C3 v1(3602.36,3318.9) ; U1.P3@3582.68,3780.17 3613.53,3811.02 U1.R2 3622.05,3823.72 3640.91,3842.58 3640.91,3849.57 3641.73,3850.39 U1.T1 ; v1(3602.36,3594.49) U1.K2
  Top Layer w10: U1.G10 U1.H9 ; U1.F6 v1(3484.25,3437.01) ; v1(3484.25,3397.64) U1.E5 ; v1(3602.36,3437.01) U1.F2
  Top Layer w12: J1.5 J1.5@2460.63,3728.35 ; C2.1 C1.1 v1(2700.79,3547.24) ; v1(2751.97,3594.49) 2761.81,3594.49 U2.17
  Bottom Layer w8: 3212.6,3598.43 v1(3248.03,3633.86) 3267.72,3653.54 C26.2 C23.2 C35.2 3326.77,3614.17 v1(3326.77,3594.49) ; C30.2 3307.09,3496.06 v1(3326.77,3515.75) 3307.09,3535.43 C32.2 3307.77,3555.8 3307.77,3574.12 3326.77,3593.12 v1(3326.77,3594.49) ; C34.2 3405.51,3614.17 v1(3405.51,3594.49) ; C33.2 3425.2,3574.8 v1(3405.51,3594.49) ; v1(3523.62,3751.97) v1(3562.99,3751.97) 3539.37,3728.35 ; v1(3326.77,3594.49) 3339.27,3594.49 3358.27,3575.49 3374.01,3575.49 3393.01,3594.49 v1(3405.51,3594.49)
  Bottom Layer w12: 3283.46,3700.79 3283.46,3688.98 C26.2 C23.2
  other v1: 3870.08,3177.17 3720.44,3222.86
  other v3: 2791.34,3641.73 2838.58,3641.73 2791.34,3688.98 2885.83,3688.98 2791.34,3736.22 2838.58,3736.22 2885.83,3736.22
LED_0: R8.1 U1.C1 | length 1374.5
  Top Layer w8: R8.1 2926.26,3201.85 v1(2929.13,3204.72) ; U1.C1 v1(3700.79,3377.95)
  Bottom Layer w8: v1(2929.13,3204.72) 3020.37,3204.72 3109.18,3115.92 3581.18,3115.92 3594.49,3129.24 3794.59,3129.24 3826.77,3161.42 3826.77,3342.52 3775.59,3393.7 3716.54,3393.7 v1(3700.79,3377.95)
LED_1: R9.1 U1.C2 | length 749.2
  Top Layer w8: R9.1 v1(3047.24,3204.72) ; U1.C2 v1(3641.73,3318.9)
  Bottom Layer w8: v1(3047.24,3204.72) 3070.72,3228.2 3070.72,3248.03 3081.85,3259.16 3137.79,3259.16 3164.67,3232.28 3539.37,3232.28 3559.06,3251.97 3602.36,3251.97 3641.73,3291.34 v1(3641.73,3318.9)
LED_2: R10.1 U1.D3 | length 601.4
  Top Layer w8: R10.1 3193.07,3147.48 3356.5,3147.48 3373.86,3164.83 3373.86,3203.88 3393.7,3223.72 3494.49,3223.72 3524.45,3253.68 3524.45,3346.39 3537.15,3359.09 3551.12,3359.09 3563.47,3371.44 3576.17,3371.44 U1.D3
LED_3: R11.1 U1.D4 | length 402.9
  Top Layer w8: R11.1 3283.46,3208.66 3315.79,3240.98 3393.64,3240.98 3406.34,3253.68 3406.34,3307.02 3419.04,3319.72 3472.38,3319.72 3483.43,3330.77 3483.43,3344.74 3497.78,3359.09 3511.75,3359.09 3530.61,3377.95 U1.D4
LED_4: R12.1 U1.E1 | length 476.2
  Top Layer w8: R12.1 v1(3401.57,3204.72) ; v1(3641.73,3397.64) U1.E1
  Bottom Layer w8: v1(3401.57,3204.72) 3539.37,3204.72 3566.93,3232.28 3618.11,3232.28 3660.73,3274.91 3660.73,3378.64 v1(3641.73,3397.64)
LED_5: R13.1 U1.D1 | length 300.1
  Top Layer w8: R13.1 3519.69,3209.55 3563.82,3253.68 3563.82,3346.39 3574.87,3357.44 3640.91,3357.44 U1.D1
LED_6: R14.1 U1.G1 | length 358
  Top Layer w8: R14.1 v1(3637.8,3204.72) ; v1(3641.73,3476.38) U1.G1
  Bottom Layer w8: v1(3637.8,3204.72) 3674.73,3241.66 3674.73,3443.38 v1(3641.73,3476.38)
LED_7: R15.1 U1.F1 | length 553.3
  Top Layer w8: U1.F1 3669.45,3464.72 3846.3,3464.72 3870.08,3440.94 3870.08,3283.46 3803.15,3216.54 3771.65,3216.54 3755.91,3200.79 R15.1
MISO: U1.T14 U4.5 | length 525.8
  Top Layer w8: U4.5 2913.58,3507.63 2933.07,3527.12 2987.98,3527.12 3017.94,3557.08 3017.94,3745.39 3063.05,3790.51 3077.02,3790.51 3091.38,3804.87 3091.38,3818.83 3102.42,3829.88 3129.09,3829.88 U1.T14
MOSI: U1.P10 U4.2 | length 1017
  Top Layer w8: U4.2 2813.58,3272.02 2826.77,3285.21 2928.77,3285.21 2966.76,3323.2 2966.76,3458.77 3011.86,3503.87 3052.01,3503.87 3063.05,3514.92 3077.02,3514.92 3091.38,3529.28 3091.38,3543.24 3104.08,3555.94 3157.42,3555.94 3170.12,3568.65 3170.12,3661.35 3182.82,3674.06 3354.27,3674.06 3365.32,3685.1 3365.32,3740.09 3352.61,3752.8 3338.65,3752.8 3326.3,3765.14 3313.6,3765.14 U1.P10
Net_1: I/O.1 U1.H1 | length 144.6
  Top Layer w8: U1.H1 3696.85,3570.87 I/O.1
Net_2: I/O.2 U1.G2 | length 267.3
  Top Layer w8: U1.G2 3634.75,3496.06 3653.61,3514.92 3668.46,3514.92 3708.5,3554.96 3808.28,3554.96 3814.13,3560.82 3814.13,3583.5 3807.09,3590.55 I/O.2
Net_3: I/O.3 U1.J3 | length 247.1
  Top Layer w8: U1.J3 3595.38,3574.8 3614.24,3555.94 3629.86,3555.94 3640.91,3566.99 3640.91,3580.96 3655.26,3595.31 3681.7,3595.31 3695.94,3609.55 3790.65,3609.55 I/O.3
Net_4: I/O.4 U1.H3 | length 312.5
  Top Layer w8: v1(3562.99,3555.12) U1.H3 ; v1(3755.91,3629.92) I/O.4
  Bottom Layer w8: v1(3562.99,3555.12) 3724.41,3555.12 3755.91,3586.61 v1(3755.91,3629.92)
Net_5: I/O.5 U1.J1 | length 195.5
  Top Layer w8: U1.J1 3680.99,3574.8 3696.73,3590.54 v1(3724.4,3590.54) ; v1(3724.41,3649.61) I/O.5
  Bottom Layer w8: v1(3724.4,3590.54) v1(3724.41,3649.61)
Net_6: I/O.6 U1.J2 | length 223.4
  Top Layer w8: U1.J2 3626.91,3579.66 3626.91,3592.36 3640.91,3606.36 ; 3642.56,3606.36 3642.56,3621.98 3653.61,3633.03 3668.35,3633.03 3704.61,3669.29 I/O.6
Net_7: I/O.7 U1.K1 | length 190.9
  Top Layer w8: U1.K1 3669.29,3614.17 3685.04,3629.92 v1(3696.85,3629.92) ; v1(3755.91,3688.98) I/O.7
  Bottom Layer w8: v1(3696.85,3629.92) 3696.85,3681.1 3704.72,3688.98 v1(3755.91,3688.98)
Net_8: I/O.8 U1.K3 | length 256
  Top Layer w8: U1.K3 3595.38,3614.17 3615.89,3634.68 3629.86,3634.68 3640.91,3645.73 3640.91,3659.7 3653.61,3672.4 3676.34,3672.4 3712.6,3708.66 I/O.8
Net_9: I/O.9 U1.N1 | length 131.6
  Top Layer w8: U1.N1 3688.98,3732.28 3692.91,3728.35 I/O.9
Net_10: I/O.10 U1.M1 | length 209.6
  Top Layer w8: U1.M1 3661.42,3705.61 3642.56,3724.47 3642.56,3740.09 3653.61,3751.14 3788.23,3751.14 I/O.10
Net_11: I/O.11 U1.P1 | length 131.6
  Top Layer w8: U1.P1 3677.17,3771.65 3681.1,3767.72 I/O.11
Net_12: I/O.12 U1.N2 | length 210.3
  Top Layer w8: U1.N2 3622.05,3739.38 3642.56,3759.89 3642.56,3779.46 3653.61,3790.51 3788.23,3790.51 I/O.12
Net_13: I/O.13 U1.P2 | length 218.5
  Top Layer w8: U1.P2 3622.05,3778.75 3642.56,3799.26 3642.56,3818.83 3653.61,3829.88 3709.49,3829.88 3732.28,3807.09 I/O.13
Net_14: I/O.14 U1.R1 | length 136.6
  Top Layer w8: U1.R1 3692.77,3811.02 v1(3692.91,3810.88) ; v1(3755.91,3826.77) I/O.14
  Bottom Layer w8: v1(3692.91,3810.88) 3708.8,3826.77 v1(3755.91,3826.77)
Net_15: I/O.15 U1.M4 | length 420.4
  Top Layer w8: I/O.15 v1(3834.19,3846.46)
  Top Layer w10: U1.M4 v1(3562.99,3712.6)
  Bottom Layer w8: v1(3562.99,3712.6) 3575.49,3712.6 3594.49,3731.6 3621.36,3731.6 3653.54,3763.78 3653.54,3803.15 3696.85,3846.46 v1(3834.19,3846.46)
Net_16: I/O.16 U1.N3 | length 275.7
  Top Layer w8: U1.N3 v1(3602.36,3751.97)
  Top Layer w10: v1(3755.91,3866.14) I/O.16
  Bottom Layer w8: v1(3602.36,3751.97) 3639.54,3789.15 3639.54,3808.95 3691.05,3860.46 3750.22,3860.46 v1(3755.91,3866.14)
NetD1_2: D1.2 R1.2 | length 45.3
  Top Layer w20: R1.2 D1.2
NetD2_2: D2.2 R2.2 | length 45.3
  Top Layer w20: R2.2 D2.2
NetD3_2: D3.2 R3.2 | length 45.3
  Top Layer w20: R3.2 D3.2
NetD4_1: D4.1 R4.1 | length 45.3
  Top Layer w20: R4.1 D4.1
NetD5_1: D5.1 R8.2 | length 49.2
  Top Layer w20: R8.2 D5.1@2975.47,3116.14
NetD6_1: D6.1 R9.2 | length 49.2
  Top Layer w20: R9.2 D6.1@3096.46,3116.14
NetD7_1: D7.1 R10.2 | length 52
  Top Layer w20: R10.2 3214.57,3116.14 D7.1
NetD8_1: D8.1 R11.2 | length 49.2
  Top Layer w20: R11.2 D8.1@3332.68,3116.14
NetD9_1: D9.1 R12.2 | length 52
  Top Layer w20: R12.2 3450.79,3116.14 D9.1
NetD10_1: D10.1 R13.2 | length 49.2
  Top Layer w20: R13.2 D10.1@3568.9,3116.14
NetD11_1: D11.1 R14.2 | length 52
  Top Layer w20: R14.2 3687.01,3116.14 D11.1
NetD12_1: D12.1 R15.2 | length 49.2
  Top Layer w20: R15.2 D12.1@3805.12,3116.14
NetF1_1: F1.1 J1.1 | length 88.1
  Top Layer w20: J1.1 F1.1
NetF1_2: F1.2 FB1.1 | length 51.2
  Top Layer w20: F1.2 FB1.1
NetJ?_2: J1.2 U2.15 | length 334.6
  Top Layer w8: J1.2 2482.28,3633.86 2488.19,3639.76 U2.15
NetJ?_3: J1.3 U2.14 | length 334.6
  Top Layer w8: J1.3 2480.32,3665.35 2486.22,3659.45 U2.14
NetJTAG_3: JTAG.3 U1.B2 | length 190.5
  Top Layer w8: U1.B2 3641.73,3279.53 3688.54,3279.53 3720.04,3311.02 JTAG.3
NetJTAG_5: JTAG.5 U1.A15 | length 939.2
  Top Layer w8: U1.A15 v1(3129.92,3240.16) ; v1(3759.84,3334.65) 3759.84,3338.58 3771.65,3350.39 JTAG.5
  Bottom Layer w8: v1(3129.92,3240.16) 3212.6,3157.48 3771.65,3157.48 3787.4,3173.23 3787.4,3307.09 v1(3759.84,3334.65)
NetJTAG_7: JTAG.7 U1.B16 | length 1108.5
  Top Layer w8: U1.B16 3070.87,3286.51 3089.72,3267.65 v1(3089.72,3240.16) ; v1(3759.84,3366.14) 3759.84,3374.02 3775.59,3389.76 JTAG.7
  Bottom Layer w8: v1(3089.72,3240.16) 3103.05,3240.16 3199.73,3143.48 3785.21,3143.48 3807.09,3165.35 3807.09,3334.19 3775.14,3366.14 v1(3759.84,3366.14)
NetJTAG_9: JTAG.9 U1.B1 | length 191.4
  Top Layer w8: U1.B1 3768.54,3406.34 3768.54,3419.5 3774.4,3425.35 3787.56,3425.35 JTAG.9
NetR5_2: R5.2 U1.R16 | length 155.1
  Top Layer w10: R5.2 2976.38,3838.58 3003.94,3811.02 U1.R16
NetR6_2: R6.2 U4.3 | length 140.3
  Top Layer w8: R6.2 2799.21,3188.98 2811.02,3200.79 2850.39,3200.79 2863.58,3213.98 U4.3
NetR7_1: R7.1 U4.7 | length 386.1
  Top Layer w8: R7.1 2748.03,3188.98 2732.28,3204.72 2732.28,3401.57 2755.91,3425.2 2795.28,3425.2 2813.58,3443.5 U4.7
NetS1_1: S1.1 S1.3 U1.A2 | length 1922.5
  Top Layer w8: S1.1 2115.35,3228.35 S1.3 ; 3602.36,3110.24 3602.36,3240.16 U1.A2
  Bottom Layer w8: S1.1 2176.61,3067.09 3586.77,3067.09 v1(3602.36,3082.68) ; S1.3@2215.35,3323.9 S1.3
NetU1_N9: U1.N9 U2.22 | length 719.2
  Top Layer w8: U2.22 2871.89,3602.52 2871.89,3592.31 2877.75,3586.46 2877.86,3586.46 2885.83,3578.49 2960.38,3578.49 2972.44,3590.55 2972.44,3700.79 v1(2960.63,3712.6) ; v1(3047.24,3712.6) 3048.07,3713.43 3078.68,3713.43 3089.72,3724.47 3089.72,3738.44 3102.42,3751.14 3157.42,3751.14 3168.46,3740.09 3168.46,3726.13 3181.17,3713.43 3196.79,3713.43 3207.83,3724.47 3207.83,3738.44 3220.54,3751.14 3314.9,3751.14 3333.76,3732.28 U1.N9
  Bottom Layer w8: v1(2960.63,3712.6) v1(3047.24,3712.6)
NetU1_R9: U1.R9 U2.21 | length 920.2
  Top Layer w8: U2.21 2852.2,3602.52 2852.2,3588.63 2885.71,3555.12 2976.38,3555.12 2988.19,3566.93 2988.19,3767.72 v1(2976.38,3779.53) ; v1(3326.77,3830.71) U1.R9
  Bottom Layer w8: v1(2976.38,3779.53) 2976.38,3858.27 3015.75,3897.64 3307.09,3897.64 3326.77,3877.95 v1(3326.77,3830.71)
NetU1_T3: U1.T3 U2.30 | length 813
  Top Layer w8: U2.30 2935.04,3718.5 v1(2964.57,3748.03) ; v1(3562.99,3889.76) 3582.68,3870.08 U1.T3
  Mid-Layer 1 w8: v1(2964.57,3748.03) 2964.57,3764.47 2957.38,3771.66 2957.38,3798.53 2980.72,3821.87 3045.45,3821.87 3129.09,3905.51 3547.24,3905.51 v1(3562.99,3889.76)
NetU1_T4: U1.T4 U2.32 | length 794.1
  Top Layer w8: U2.32 2925.2,3771.65 v1(2937.01,3783.46) ; v1(2944.88,3909.45) 3503.94,3909.45 3543.31,3870.08 U1.T4
  Bottom Layer w8: v1(2937.01,3783.46) 2937.01,3901.57 v1(2944.88,3909.45)
NetU1_T5: U1.T5 U2.2 | length 759.4
  Top Layer w8: U2.2 2887.8,3789.37 2898.32,3799.9 2898.32,3885.83 2909.28,3896.78 2925.2,3896.78 2932.21,3889.76 3484.25,3889.76 3503.94,3870.08 U1.T5
NetU1_T6: U1.T6 U2.8 | length 879.8
  Top Layer w8: v1(2724.41,3783.46) 2732.28,3775.59 U2.8 ; v1(2917.32,3874.02) 2929.13,3874.02 2933.07,3870.08 3444.88,3870.08 U1.T6
  Bottom Layer w8: v1(2724.41,3783.46) 2724.41,3858.27 2736.22,3870.08 2897.64,3870.08 2901.57,3874.02 v1(2917.32,3874.02)
PWR_ON: U2.10 U3.1 U3.15 U3.16 | length 1089.5
  Top Layer w8: U3.15 U3.16 2367.13,3203.74 v1(2397.64,3173.23) 2399.61,3175.2 U3.1 ; v1(2706.69,3738.19) U2.10
  Bottom Layer w8: v1(2397.64,3173.23) 2385.83,3173.23 2354.33,3204.72 2354.33,3460.63 2397.64,3503.94 2397.64,3712.6 2421.26,3736.22 2704.72,3736.22 v1(2706.69,3738.19)
RX_LED: R2.1 U2.9 | length 198.9
  Top Layer w8: R2.1 2568.53,3734.25 2592.31,3758.03 2751.81,3758.03 U2.9
TX_LED: R1.1 U2.11 | length 309.5
  Top Layer w8: R1.1 2511.81,3700.79 2527.56,3685.04 2724.41,3685.04 2732.28,3692.91 2732.28,3712.6 2738.19,3718.5 U2.11
VCC: C1.2 C2.2 FB1.2 U2.18 U2.19 U3.2 U3.3 U3.10 | length 1401.3
  Top Layer w10: 2397.64,3374.02 2425.2,3374.02 2438.98,3360.24 U3.10 ; 2417.32,3141.73 2419.29,3143.7 ; U3.2 2419.29,3143.7 ; U3.3 2438.98,3163.39 2419.29,3143.7 ; 2771.65,3562.99 2789.37,3580.71 U2.18 ; 2795.28,3562.99 2809.06,3576.77 U2.19
  Top Layer w20: 2732.28,3562.99 2771.65,3562.99 2795.28,3562.99
  Top Layer w25: 2417.32,3141.73 2370.08,3141.73 2326.77,3185.04 2326.77,3346.46 2354.33,3374.02 2397.64,3374.02 2397.64,3456.69 2440.94,3500 2708.66,3500 2732.28,3523.62 2732.28,3562.99 2692.91,3602.36 C1.2 C2.2 FB1.2
pads on no net: I/O.0 J1.4 JTAG.0 U1.A3 U1.A4 U1.A5 U1.A6 U1.A7 U1.A8 U1.A9 U1.A10 U1.A11 U1.A12 U1.A13 U1.A14 U1.B3 U1.B4 U1.B6 U1.B8 U1.B10 U1.B12 U1.B14 U1.B15 U1.C4 U1.C5 U1.C6 U1.C7 U1.C8 U1.C9 U1.C10 U1.C11 U1.C12 U1.C13 U1.C15 U1.C16 U1.D5 U1.D6 U1.D7 U1.D8 U1.D9 U1.D10 U1.D11 U1.D12 U1.D13 U1.D14 U1.D15 U1.D16 U1.E2 U1.E3 U1.E4 U1.E6 U1.E7 U1.E9 U1.E10 U1.E13 U1.E14 U1.E16 U1.F3 U1.F4 U1.F7 U1.F8 U1.F9 U1.F10 U1.F11 U1.F12 U1.F13 U1.F14 U1.F15 U1.F16 U1.G3 U1.G4 U1.G5 U1.G6 U1.G11 U1.G12 U1.G13 U1.G14 U1.G16 U1.H4 U1.H5 U1.H6 U1.H7 U1.H10 U1.H11 U1.H13 U1.H14 U1.H15 U1.H16 U1.J4 U1.J6 U1.J7 U1.J10 U1.J11 U1.J12 U1.J13 U1.J14 U1.J16 U1.K4 U1.K5 U1.K6 U1.K11 U1.K12 U1.K13 U1.K14 U1.K15 U1.K16 U1.L1 U1.L2 U1.L3 U1.L4 U1.L5 U1.L6 U1.L7 U1.L8 U1.L9 U1.L10 U1.L13 U1.L14 U1.L16 U1.M3 U1.M7 U1.M8 U1.M10 U1.M11 U1.M13 U1.M14 U1.M15 U1.M16 U1.N5 U1.N6 U1.N7 U1.N8 U1.N10 U1.N11 U1.N12 U1.N13 U1.N14 U1.N16 U1.P5 U1.P6 U1.P7 U1.P8 U1.P9 U1.P11 U1.P12 U1.P13 U1.P15 U1.P16 U1.R3 U1.R5 U1.R7 U1.R11 U1.R13 U1.R15 U1.T7 U1.T8 U1.T9 U1.T10 U1.T11 U1.T12 U1.T13 U2.3 U2.5 U2.6 U2.7 U2.12 U2.13 U2.16 U2.23 U2.25 U2.27 U2.28 U2.29 U2.31 U3.4 U3.7 U3.9 U3.11 U3.13 U3.14 U4.9
copper on no net:
  other v3: 2405.51,3248.03 2452.76,3248.03 2405.51,3295.28 2452.76,3295.28
  other v4: 3893.7,3074.8 2074.8,3909.45

## Polygon pours and split planes (outlines as drawn)
3V3 on Top Layer "3V3_PWR" (solid, pour order 15): 2472.44,3251.97 2503.94,3251.97 2507.87,3248.03 2507.87,3212.6 2519.68,3200.79 2523.62,3196.85 2586.61,3196.85 2586.61,3082.68 2586.61,3059.06 2448.82,3059.06 2437.01,3070.87 2437.01,3177.17 2437.01,3216.54 2472.44,3251.97
1V2 on Top Layer "1V2_PWR" (solid, pour order 11): 2437.01,3295.28 2512.35,3295.28 2512.35,3315.52 2522.4,3325.65 2572.63,3325.65 2577.65,3325.65 2582.68,3330.71 2582.68,3467.38 2577.65,3472.44 2517.38,3472.44 2457.1,3472.44 2437.01,3452.19 2437.01,3300.34 2442.03,3295.28
GND on Top Layer "GND_POUR" (solid, remove dead copper, pour order 5): 2054.8,3937.95 2054.8,3056.06 3920.94,3056.06 3920.94,3937.95 2054.8,3937.95
GND on Bottom Layer "GND_POUR" (solid, pour order 6): 2051.18,3933.07 2051.18,3051.18 3917.32,3051.18 3917.32,3933.07 2051.18,3933.07
3V3 on Mid-Layer 1 "3V3_PWR" (solid, pour order 8): 2051.18,3933.07 2051.18,3051.18 3917.32,3051.18 3917.32,3933.07 2051.18,3933.07
1V2 on Mid-Layer 2 "1V2_PWR" (solid, pour order 7): 2051.18,3933.07 2051.18,3051.18 3917.32,3051.18 3917.32,3933.07 2051.18,3933.07

## Keep-outs
Keep-Out Layer:
  lines w11.81: 2051.18,3051.18 3917.32,3051.18 3917.32,3933.07 2051.18,3933.07 2051.18,3051.18

## Silkscreen, mask and mechanical layers (free items; w line width, h text height)
Top Overlay:
  lines w8: 2889.76,3192.76 2889.76,3086.61 3842.52,3086.61 3842.52,3192.91 ; 3011.81,3086.77 3011.81,3192.91 ; 3129.92,3086.77 3129.92,3192.91 ; 3251.97,3086.77 3251.97,3192.91 ; 3366.14,3086.77 3366.14,3192.91 ; 3484.25,3086.77 3484.25,3192.91 ; 3602.36,3086.77 3602.36,3192.91 ; 3720.47,3086.77 3720.47,3192.91
  text "RX" at 2507.87,3917.32 h40
  text "ON" at 2610.24,3917.32 h40
  text "Spartan3A Dev Board" at 2996.06,3917.32 h40
  text "TX" at 2397.64,3870.08 h40
  text "DONE" at 2696.85,3870.08 h40
  text "LED[0..7]" at 3208.66,3027.56 h40
Bottom Solder:
  drawing of 616 lines, arcs and shapes, not listed
  text "Henry Millican" at 3885.83,3807.09 h40 r90
  text "rmmod.net" at 3814.96,3748.03 h40 r90
Drill Drawing:
  text ".LEGEND" at 4168.5,3200 h60
  text "Drill Drawing." at 4168.5,3100 h60

## Dimensions
2051.18,3051.18 to 3917.32,3051.18 on Mechanical 1
2051.18,3051.18 to 2051.18,3933.07 on Mechanical 1